# Altium PCB Telliskivi2014MainBoard.PcbDoc
Units mm, origin at the board's own origin, x right, y up, seen from the top; angles counter-clockwise.
Board outline 68 x 70 mm, 2 copper layers (Top Layer, Bottom Layer), stack 1.571 mm thick; 60 components, 72 nets, 319 pads, 235 vias.
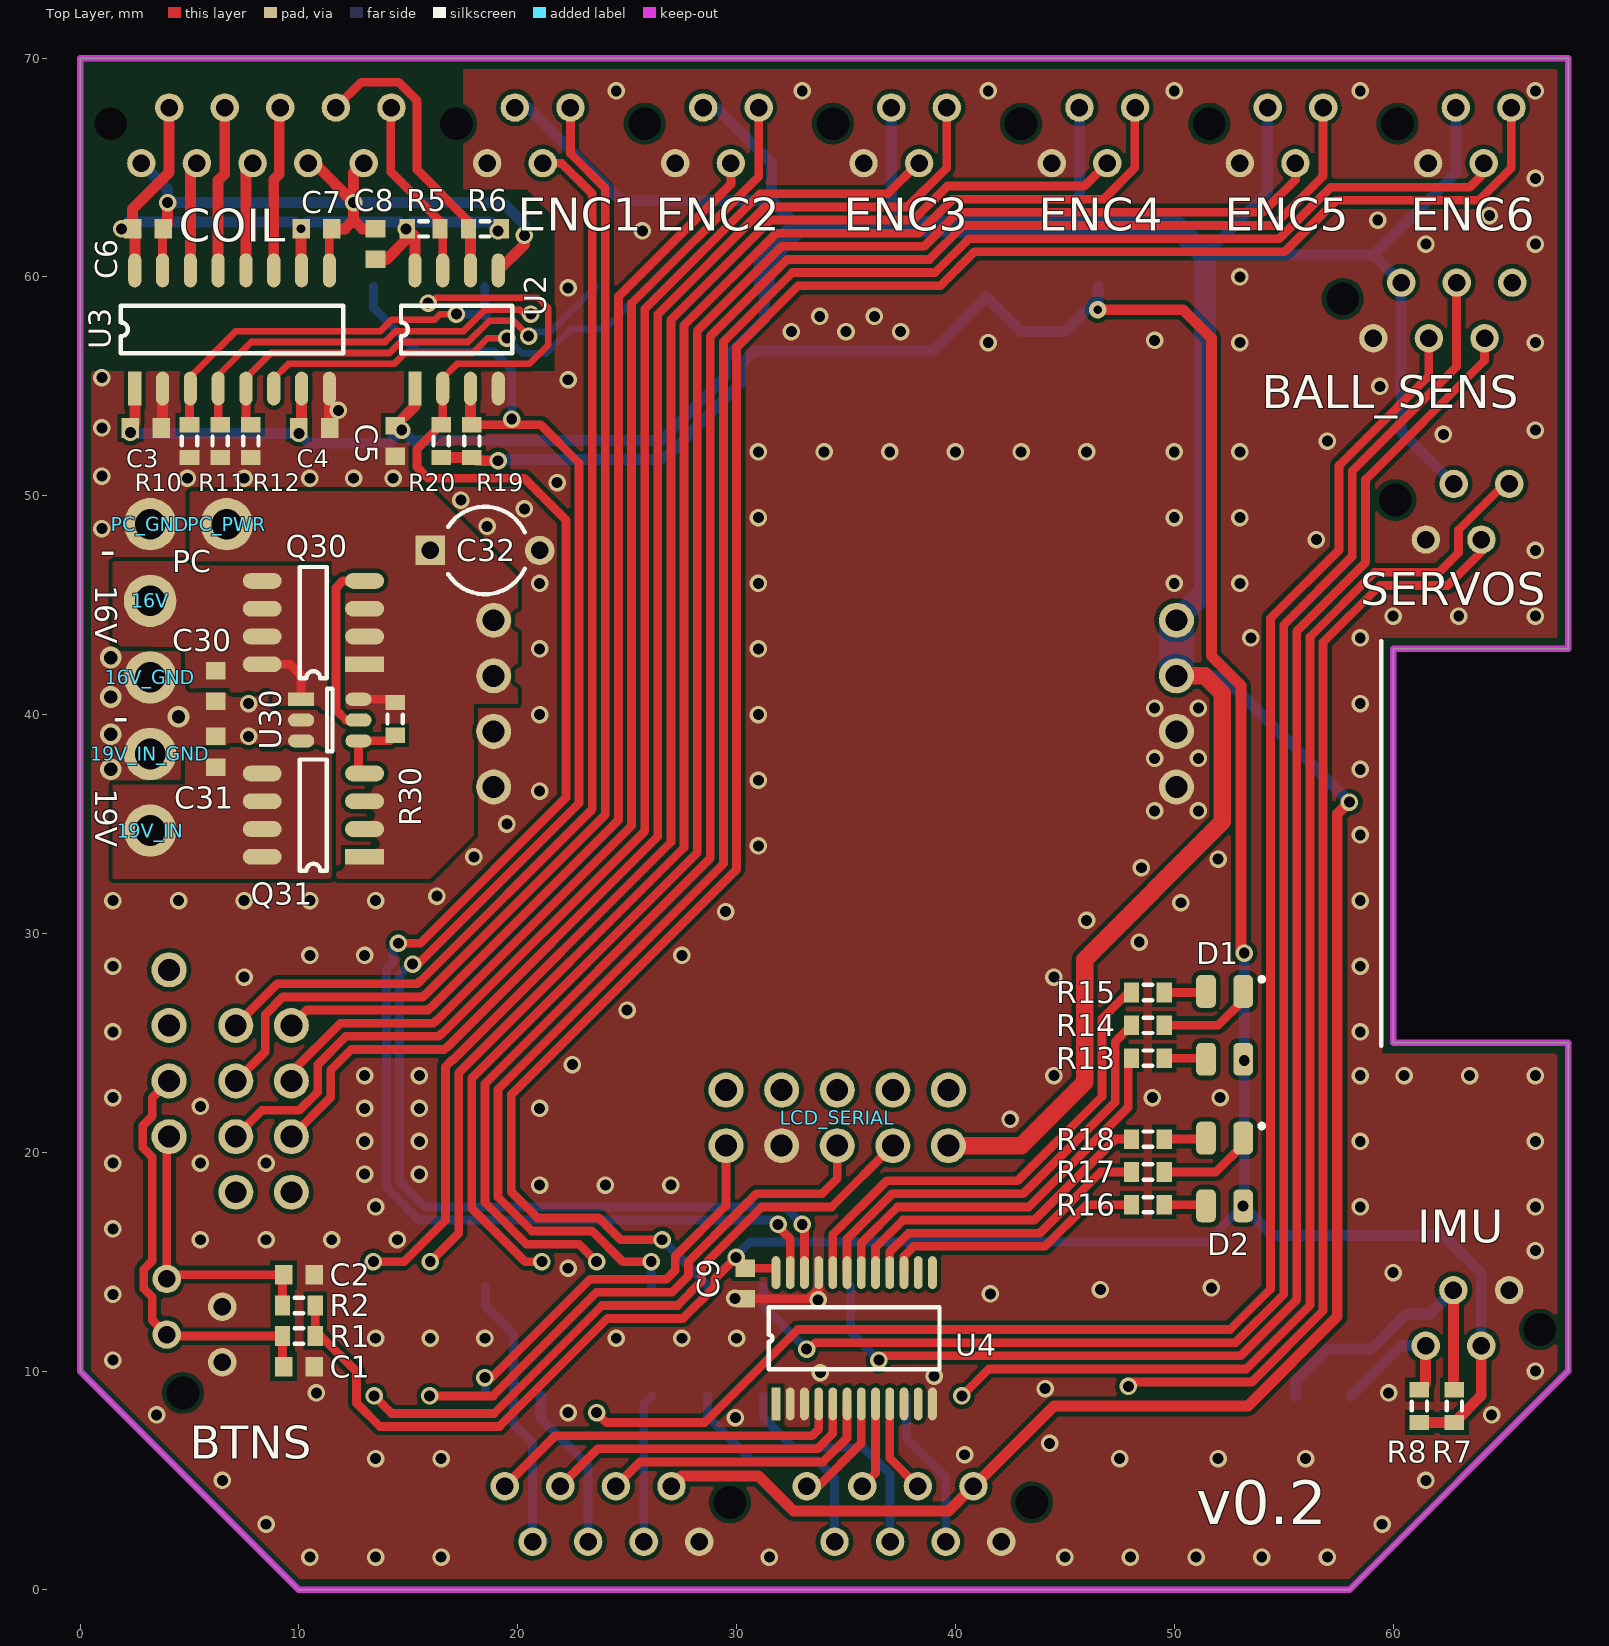
[diagram p0: Top Layer view]
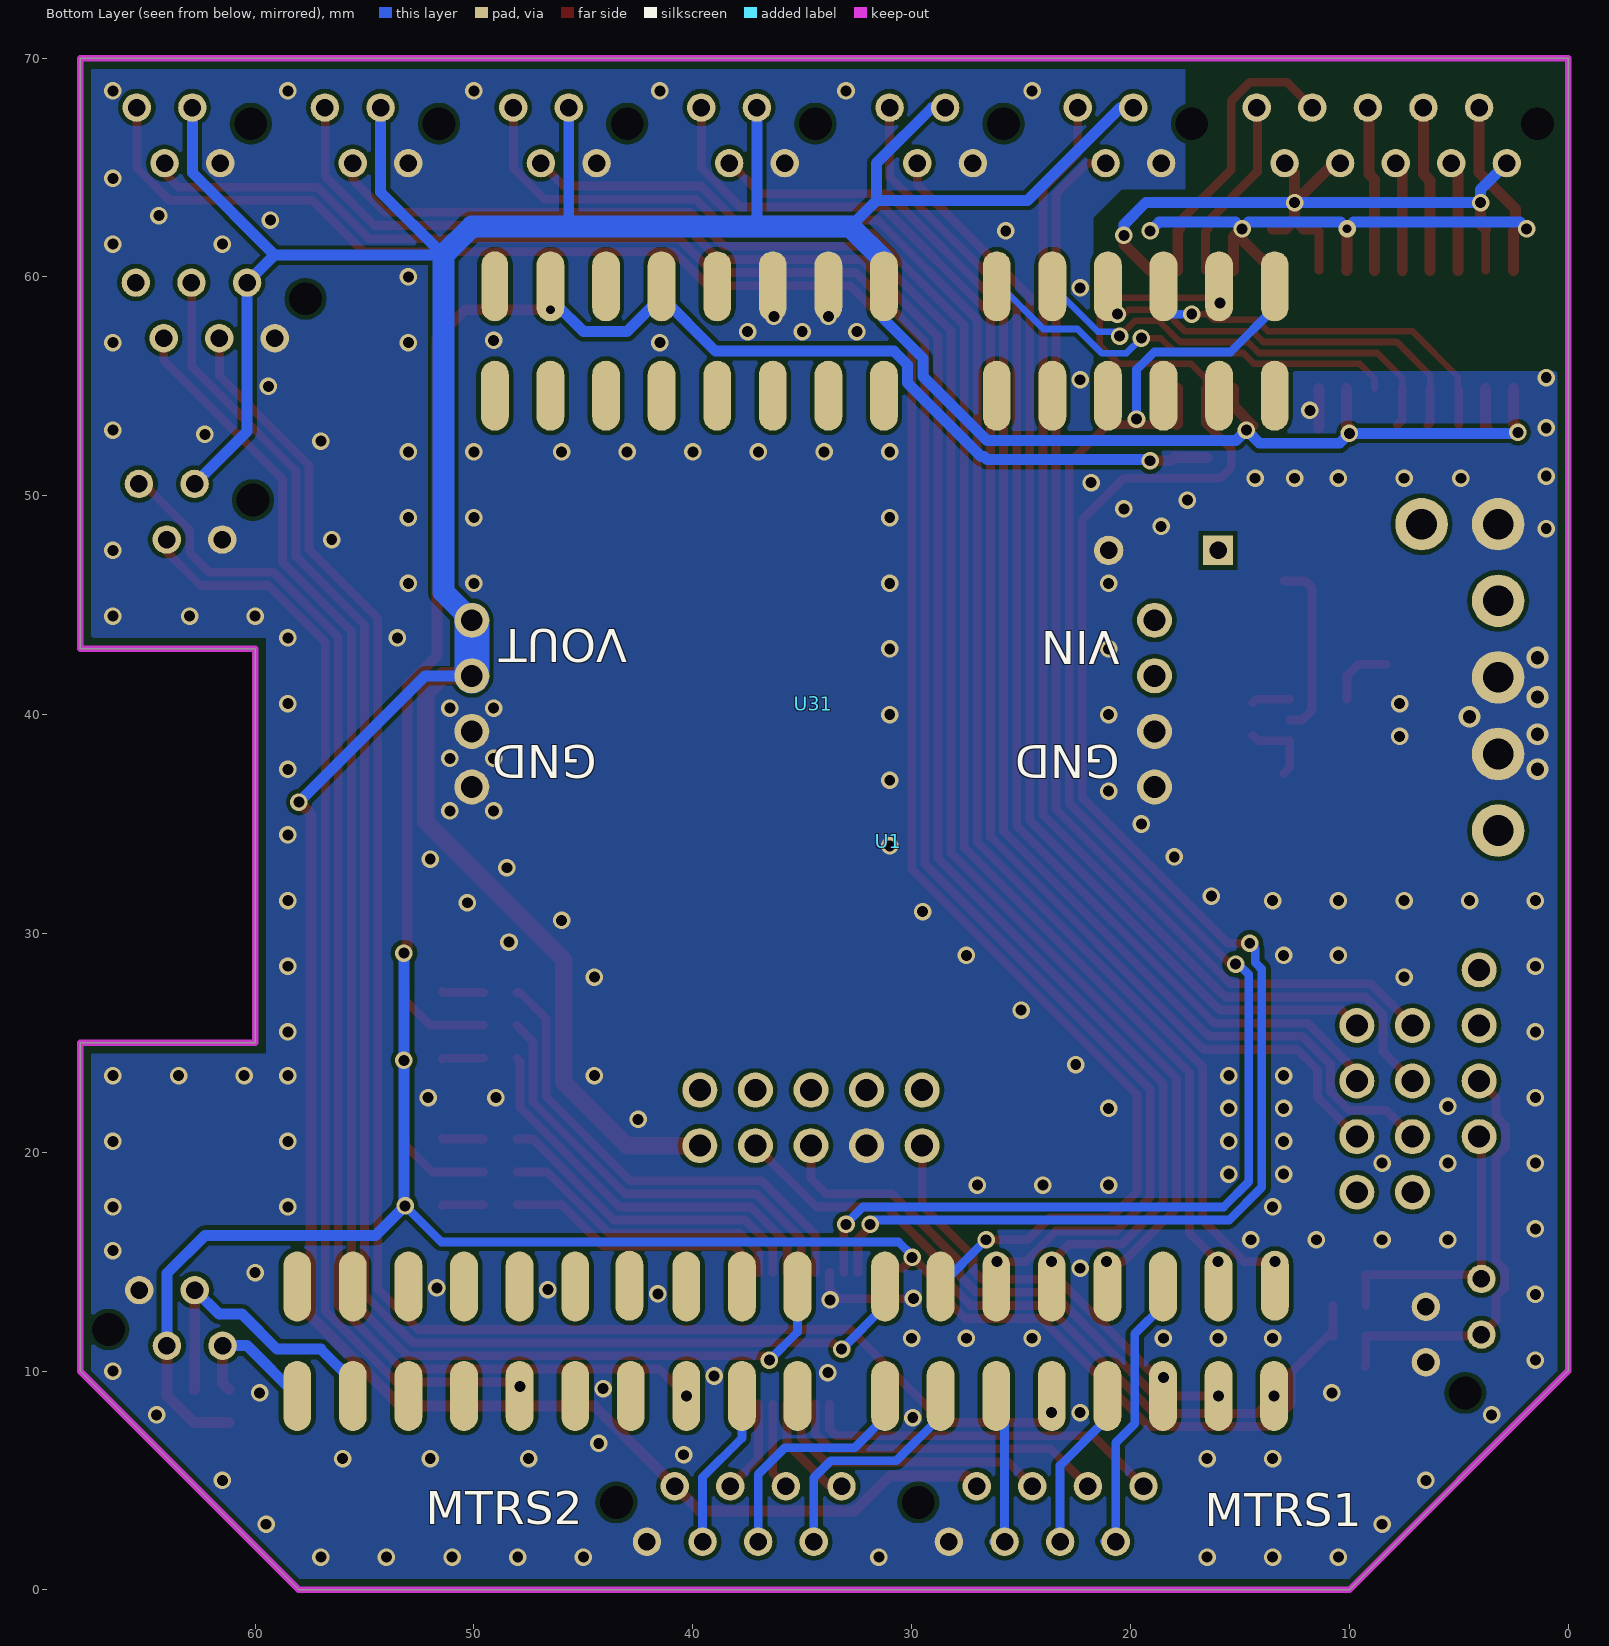
[diagram p1: Bottom Layer view, seen from below]

## Layer stack, top to bottom
Top Solder: solder mask 0.0102, Solder Resist, Dk 3.5
Top Layer: signal copper 0.0356
Dielectric 1: dielectric 1.5, FR-4, Dk 4.8
Bottom Layer: signal copper 0.0356
Bottom Solder: solder mask 0.0102, Solder Resist, Dk 3.5

## Board outline
10,0 58,0 68,10 68,25 60,25 60,43 68,43 68,70 0,70 0,10

## Design rules (kind name [scope] priority, off if disabled: settings)
Clearance [All] p1: gap=0.2
ComponentClearance [Not InComponent('U1') And InComponent('U31') vs Not InComponent('U1') And InComponent('U31')] p1: gap=0.254 collisioncheckmode=3 verticalgap=0.254 showdistances=TRUE
MinimumSolderMaskSliver [All] p1: minsoldermaskwidth=0.1
PlaneClearance [All] p1: clearance=0.5
PolygonConnect [All] p1: connectstyle=Direct reliefconductorwidth=0.3 reliefentries=4 polygonreliefangle="90 Angle" airgapwidth=0.3
RoomDefinition Telliskivi2014MainBoardPower [InComponentClass('Telliskivi2014MainBoardPower')] p1: confinementstyle=ConfineIn formatcopy=TRUE lockcomponents=FALSE outline -43.2,0 114.6,0 114.6,70 -43.2,70
RoomDefinition Telliskivi2014MainBoard [InComponentClass('Telliskivi2014MainBoard')] p2: confinementstyle=ConfineIn formatcopy=TRUE lockcomponents=FALSE outline -43.2,0 114.6,0 114.6,70 -43.2,70
RoutingVias [All] p1: holewidth=0.5 width=0.8 viastyle="Through Hole" minholewidth=0.4 minwidth=0.7 maxholewidth=0.7 maxwidth=1
SilkToSilkClearance [All] p1: silktosilkclearance=0.2
SilkToSolderMaskClearance [IsPad] p1: minsilkscreentomaskgap=0.2 clearancetoexposedcopper=TRUE
SolderMaskExpansion SolderMaskExpansion_Via [IsVia And (Not IsTestpoint)] p1: expansion=-5
SolderMaskExpansion [All] p2: expansion=0.1
UnpouredPolygon [All] p1: allowunpoured=FALSE
Width [All] p1: maxlimit=5 minlimit=0.3 preferedwidth=0.4 minimp=50.000000 maximp=50.000000 favimp=50.000000
24 further rules are at their usual default settings.

## Classes and differential pairs
component class Telliskivi2014MainBoard: BALL_SENS BTNS C1 C2 C3 C4 C5 C6 C7 C8 C9 COIL D1 D2 ENC1 ENC2 ENC3 ENC4 ENC5 ENC6 IMU LCD_SERIAL MTRS1 MTRS2 R1 R2 R5 R6 R7 R8 R10 R11 R12 R13 R14 R15 R16 R17 R18 R19 R20 SERVOS U1 U2 U3 U4
component class Telliskivi2014MainBoardPower: 16V 16V_GND 19V_IN 19V_IN_GND C30 C31 C32 PC_GND PC_PWR Q30 Q31 R30 U30 U31

## Components (designator, comment, footprint, x,y, rotation, side; value= is the part's Value field where it differs from the comment)
16V "HEADER-1" POWER-VIA 3.2,45.2 r0 top
16V_GND "HEADER-1" POWER-VIA 3.2,41.7 r90 top
19V_IN "HEADER-1" POWER-VIA 3.2,34.7 r0 top
19V_IN_GND "HEADER-1" POWER-VIA 3.2,38.2 r90 top
BALL_SENS "HEADER-6" MICRO-MATCH-6 59.1,57.2 r180 top
BTNS "HEADER-4" MICRO-MATCH-4 6.5,10.4 r270 top
C1 "100nF" 1608[0603] 10,10.2 r180 top
C2 "100nF" 1608[0603] 10,14.4 r180 top
C3 "100nF" 1608[0603] 3,53.1 r180 top
C4 "100nF" 1608[0603] 10.7,53.1 r0 top
C5 "100nF" 1608[0603] 14.4,52.5 r270 top
C6 "100nF" 1608[0603] 3.1,62.2 r0 top
C7 "100nF" 1608[0603] 10.8,62.2 r180 top
C8 "100nF" 1608[0603] 13.5,61.5 r270 top
C9 "100nF" 1608[0603] 30.4,14 r90 top
C30 "100nF" 1608[0603] 6.2,41.3 r270 top
C31 "100nF" 1608[0603] 6.2,38.3 r90 top
C32 "470uF" CAPR5-4X5 18.5,47.5 r0 top
COIL "HEADER-10" MICRO-MATCH-10 2.8,65.2 r180 top
D1 "RGB-LED" RGB-LED 52.3,25.8 r270 top
D2 "RGB-LED" RGB-LED 52.3,19.1 r270 top
ENC1 "HEADER-4" MICRO-MATCH-4 18.6,65.2 r180 top
ENC2 "HEADER-4" MICRO-MATCH-4 27.2,65.2 r180 top
ENC3 "HEADER-4" MICRO-MATCH-4 35.8,65.2 r180 top
ENC4 "HEADER-4" MICRO-MATCH-4 44.4,65.2 r180 top
ENC5 "HEADER-4" MICRO-MATCH-4 53,65.2 r180 top
ENC6 "HEADER-4" MICRO-MATCH-4 61.6,65.2 r180 top
IMU "HEADER-4" MICRO-MATCH-4 65.3,13.7 r0 top
LCD_SERIAL "uLCD-144-G2" uLCD-144-G2-NO-OVERLAY 19.1,17.7 r0 top
MTRS1 "HEADER-8" MICRO-MATCH-8 28.295,2.2 r0 bottom
MTRS2 "HEADER-8" MICRO-MATCH-8 42.095,2.2 r0 bottom
PC_GND "HEADER-1" POWER-VIA 3.2,48.7 r90 top
PC_PWR "HEADER-1" POWER-VIA 6.7,48.7 r90 top
Q30 "PMOS" SO8 13,42.3 r180 top
Q31 "PMOS" SO8 13,33.5 r180 top
R1 "10k" J1-0603 10,11.6 r180 top
R2 "10k" J1-0603 10,13 r180 top
R5 "2.2k" J1-0603 15.7,62.2 r180 top
R6 "2.2k" J1-0603 18.5,62.2 r0 top
R7 "2.2k" J1-0603 62.8,8.4 r90 top
R8 "2.2k" J1-0603 61.2,8.4 r90 top
R10 "10k" J1-0603 5,52.5 r90 top
R11 "10k" J1-0603 6.4,52.5 r90 top
R12 "10k" J1-0603 7.8,52.5 r90 top
R13 "1k" J1-0603 48.8,24.3 r180 top
R14 "1k" J1-0603 48.8,25.8 r180 top
R15 "1k" J1-0603 48.8,27.3 r180 top
R16 "1k" J1-0603 48.8,17.6 r180 top
R17 "1k" J1-0603 48.8,19.1 r180 top
R18 "1k" J1-0603 48.8,20.6 r180 top
R19 "2.2k" J1-0603 17.9,52.5 r90 top
R20 "2.2k" J1-0603 16.5,52.5 r90 top
R30 "470k" J1-0603 14.4,39.8 r90 top
SERVOS "HEADER-4" MICRO-MATCH-4 61.5,48 r180 top
U1 "FRDM-K64F" FRDM-K64F-SMT-NO-OVERLAY 62,58.1 r180 top locked
U2 "SI8602" SOIC8 15.3,54.9 r90 top
U3 "SI8641" SOIC16 2.5,54.9 r90 top
U4 "PCA9555" TSSOP24 31.8,8.5 r90 top
U30 "LTC4412" TSOT-23-6 10.1,40.7 r0 top
U31 "POLOLU-D24V90F5" POLOLU-D24V90F5-NO-OUTLINE 34.5,40.5 r0 bottom

## Footprints (in the part's own frame and the unit in brackets; to place one, negate y for a bottom-side part, rotate by r counter-clockwise, add the part's x,y. Pads: shape width x height; smd on the part's side, far side on the other; paste and mask are expansions set on the pad)
1608[0603] [mm] "Chip Capacitor, Body 1.6x0.8mm, IPC High Density"
  rect 0.8x0.9 smd: 1(-0.7,0) 2(0.7,0)
  body extent -0.87,-0.48 0.87,0.48, height 1.3
CAPR5-4X5 [mm] "Capacitor; 2 Leads"
  rect 1.35x1.35 hole 0.8: 1(-2.5,0)
  round 1.35 hole 0.8: 2(2.5,0)
  silkscreen extent -1.69,-2 1.82,2
FRDM-K64F-SMT-NO-OVERLAY [mm]
  oval 1.2x3.2 smd far side: 1(12.954,-1.471)
  oval 1.27x3.2 smd far side: 2(15.494,-1.471) 3(18.034,-1.471) 4(20.574,-1.471) 5(23.114,-1.471) 6(25.654,-1.471) 7(28.194,-1.471) 8(30.734,-1.471) 9(35.89,-1.471) 10(38.43,-1.471) 11(40.97,-1.471) 12(43.51,-1.471) 13(46.05,-1.471) 14(48.59,-1.471) 15(12.954,3.529) 16(15.494,3.529) 17(18.034,3.529) 18(20.574,3.529) 19(23.114,3.529) 20(25.654,3.529) 21(28.194,3.529) 22(30.734,3.529) 23(35.89,3.529) 24(38.43,3.529) 25(40.97,3.529) 26(43.51,3.529) 27(46.05,3.529) 28(48.59,3.529) 41(48.6,44.2) 42(46.025,44.236) 43(43.485,44.236) 44(40.945,44.236) 45(38.405,44.236) 46(35.865,44.236) 47(33.325,44.236) 48(30.785,44.236) 49(26.784,44.236) 50(24.244,44.236) 51(21.704,44.236) 52(19.1,44.2) 53(16.624,44.236) 54(14.084,44.236) 55(11.544,44.236) 56(9.004,44.236) 57(6.464,44.236) 58(3.924,44.236) 59(48.565,49.236) 60(46.025,49.236) 61(43.485,49.236) 62(40.945,49.236) 63(38.405,49.236) 64(35.865,49.236) 65(33.325,49.236) 66(30.785,49.236) 67(26.784,49.236) 68(24.244,49.236) 69(21.704,49.236) 70(19.164,49.236) 71(16.624,49.236) 72(14.084,49.236) 73(11.544,49.236) 74(9.004,49.236) 75(6.464,49.236) 76(3.924,49.236)
  round 1.6 hole 1: 29(52.344,39.926) 30(52.344,37.386) 31(52.344,34.846) 32(52.344,32.306) 33(54.884,32.306) 34(54.884,34.846) 35(54.884,37.386) 36(54.884,39.926) 37(57.932,37.386) 38(57.932,34.846) 39(57.932,32.306) 40(57.932,29.766)
  silkscreen extent 2.54,14.74 2.54,33.23
J1-0603 [mm] "Chip Resistor, Body 1.6x0.8mm, IPC High Density"
  rect 0.7x0.9 smd: 1(-0.75,0) 2(0.75,0)
  silkscreen extent -0.2,-0.35 0.2,0.35, body extent -0.85,-0.48 0.85,0.48, height 0.9
MICRO-MATCH-4 [mm]
  round 1.3 hole 0.8: 1(0,0) 2(-1.27,-2.54) 3(-2.54,0) 4(-3.81,-2.54)
  round 0 hole 1.5 unplated: drill(1.4,-1.8)
MICRO-MATCH-6 [mm]
  round 1.3 hole 0.8: 1(0,0) 2(-1.27,-2.54) 3(-2.54,0) 4(-3.81,-2.54) 5(-5.08,0) 6(-6.35,-2.54)
  round 0 hole 1.5 unplated: drill(1.4,-1.8)
MICRO-MATCH-8 [mm]
  round 1.3 hole 0.8: 1(0,0) 2(-1.27,-2.54) 3(-2.54,0) 4(-3.81,-2.54) 5(-5.08,0) 6(-6.35,-2.54) 7(-7.62,0) 8(-8.89,-2.54)
  round 0 hole 1.5 unplated: drill(1.4,-1.8)
MICRO-MATCH-10 [mm]
  round 1.3 hole 0.8: 1(0,0) 2(-1.27,-2.54) 3(-2.54,0) 4(-3.81,-2.54) 5(-5.08,0) 6(-6.35,-2.54) 7(-7.62,0) 8(-8.89,-2.54) 9(-10.16,0) 10(-11.43,-2.54)
  round 0 hole 1.5 unplated: drill(1.4,-1.8)
POLOLU-D24V90F5-NO-OUTLINE [mm]
  round 1.6 hole 1: 1(-15.6,3.81) 2(-15.6,1.27) 3(-15.6,-1.27) 4(-15.6,-3.81) 5(15.6,-3.81) 6(15.6,-1.27) 7(15.6,1.27) 8(15.6,3.81)
POWER-VIA [mm]
  round 2.4 hole 1.4: 1(0,0)
RGB-LED [mm] "WURTH ELEKTRONIK 150141M173100"
  rrect50% 1.5x0.9 smd: 1(1.55,0.85) 2(1.55,-0.85) 3(-1.55,0.85) 4(-1.55,-0.85)
  silkscreen extent -2.2,1.6 -2,1.8
SO8 [mm]
  rect 1.78x0.72 smd: 1(0,0)
  oval 1.78x0.72 smd: 2(0,-1.27) 3(0,-2.54) 4(0,-3.81) 5(4.68,-3.81) 6(4.68,-2.54) 7(4.68,-1.27) 8(4.68,0)
  silkscreen extent 1.72,-4.44 2.96,0.64
SOIC8 [mm]
  rect 1.55x0.6 smd: 1(0,0)
  oval 1.55x0.6 smd: 2(0,-1.27) 3(0,-2.54) 4(0,-3.81) 5(5.4,-3.81) 6(5.4,-2.54) 7(5.4,-1.27) 8(5.4,0)
  silkscreen extent 1.61,-4.44 3.79,0.64
SOIC16 [mm]
  rect 1.55x0.6 smd: 1(0,0)
  oval 1.55x0.6 smd: 2(0,-1.27) 3(0,-2.54) 4(0,-3.81) 5(0,-5.08) 6(0,-6.35) 7(0,-7.62) 8(0,-8.89) 9(5.4,-8.89) 10(5.4,-7.62) 11(5.4,-6.35) 12(5.4,-5.08) 13(5.4,-3.81) 14(5.4,-2.54) 15(5.4,-1.27) 16(5.4,0)
  silkscreen extent 1.61,-9.53 3.79,0.64
TSOT-23-6 [mm]
  rect 1.2x0.6 smd: 1(0,0)
  oval 1.2x0.6 smd: 2(0,-0.95) 3(0,-1.9) 4(2.62,-1.9) 5(2.62,-0.95) 6(2.62,0)
  silkscreen extent 1.19,-2.38 1.43,0.48
TSSOP24 [mm]
  rect 1.5x0.4 smd: 1(0,0)
  oval 1.5x0.4 smd: 2(0,-0.65) 3(0,-1.3) 4(0,-1.95) 5(0,-2.6) 6(0,-3.25) 7(0,-3.9) 8(0,-4.55) 9(0,-5.2) 10(0,-5.85) 11(0,-6.5) 12(0,-7.15) 13(6,-7.15) 14(6,-6.5) 15(6,-5.85) 16(6,-5.2) 17(6,-4.55) 18(6,-3.9) 19(6,-3.25) 20(6,-2.6) 21(6,-1.95) 22(6,-1.3) 23(6,-0.65) 24(6,0)
  silkscreen extent 1.58,-7.48 4.42,0.33
uLCD-144-G2-NO-OVERLAY [mm]
  round 1.6 hole 1: 1(20.58,2.6) 2(18.04,2.6) 3(15.5,2.6) 4(12.96,2.6) 5(10.42,2.6) 6(20.58,5.14) 7(18.04,5.14) 8(15.5,5.14) 9(12.96,5.14) 10(10.42,5.14)
  body extent 0,0 31,43, height 13.7

## Part data
C1 C2 C3 C4 C5 C6 C7 C8 C9 C30 C31: library part "Cap Semi", "Capacitor (Semiconductor SIM Model)"
C32: library part Cap2, "Capacitor"
R1 R2 R5 R6 R7 R8 R10 R11 R12 R13 R14 R15 R16 R17 R18 R19 R20 R30: library part Res3, "Resistor"

## Via types
v1: diameter 0.8, hole 0.5, Top Layer to Bottom Layer, 228 vias
v2: diameter 1, hole 0.6, Top Layer to Bottom Layer, 5 vias
v3: diameter 0.8, hole 0.4, Top Layer to Bottom Layer, 2 vias

## Nets (pads, with @x,y where several pads share a name; then routed paths per layer and width w, separated by ;. In a path a pad name is that pad's centre, name@x,y a point inside that pad or via, vN(x,y) a via of type N, cw(c..) or ccw(c..) an arc to the next point about the centre after c; other vN are vias at no path point)
3V3: C9.2 D1.1 D2.1 IMU.2 R1.1 R2.1 R7.1 R8.1 R19.1 R20.1 U1.2 U1.4 U4.24 | length 155.5
  Top Layer w0.4: R2.1 R1.1 11,11.6 12.635,9.965 12.635,8.533 13.704,7.464 19.161,7.464 24.097,12.4 27.546,12.4 29,13.854 29,14.22 v1(29.98,15.2) 29.98,15.12 C9.2 31.6,14.7 ; D1.1 v1(53.2,24.2)
  Top Layer w0.5: R20.1 R19.1 17.95,51.8 18.15,51.6 v1(19.1,51.6) ; v3(46.5,58.5) 50.4,58.5 51.7,57.2 51.7,42.672 53.05,41.322 53.05,29.25 v1(53.2,29.1) ; R8.1 R7.1 64.03,8.88 IMU.2
  Bottom Layer w0.4: v1(29.98,15.2) 29.98,15.28 30.6,15.9 51.5,15.9 v1(53.15,17.55)
  Bottom Layer w0.5: v1(19.1,51.6) 19.15,51.65 26.55,51.65 26.7,51.8 26.828,51.8 30.181,55.153 30.181,55.985 30.817,56.621 38.973,56.621 41.426,59.074 43,57.5 45,57.5 U1.2@46.25,58.75 ; v3(46.5,58.5) 46.506,58.506 U1.2 ; v1(53.2,29.1) v1(53.2,24.2) 53.2,17.6 v1(53.15,17.55) 54.5,16.2 62.3,16.2 64.03,14.47 IMU.2
5V: BALL_SENS.2 C3.2 C4.1 C5.1 ENC1.2 ENC2.2 ENC3.2 ENC4.2 ENC5.2 ENC6.2 LCD_SERIAL.1 MTRS1.2 MTRS2.2 SERVOS.2 U1.8 U2.1 U3.1 U3.7 U31.5 U31.6 | length 249.1
  Top Layer w0.5: C3.2 2.5,53.3 U3.1 ; C4.1 10.12,53.22 U3.7 ; C5.1 15.3,54.1 U2.1 ; MTRS1.2 27.485,5.2 31,5.2 32.6,3.6 39.685,3.6 MTRS2.2 40.842,4.74 44.502,8.4 53.362,8.4 57.45,12.488 57.45,35.45 v1(58,36)
  Top Layer w0.8: LCD_SERIAL.1 43,20.3 45.9,23.2 45.9,28.8 52.2,35.1 52.2,40.97 51.4,41.77 U31.6
  Bottom Layer w0.5: v1(2.3,52.9) 2.35,52.85 v1(10,52.85) 10.45,52.4 14.1,52.4 v1(14.7,53) 15.179,52.521 26.559,52.521 29.481,55.443 29.481,56.281 31.266,58.066 U1.8 ; ENC1.2 20.46,67.74 24.7,63.5 31.6,63.5 ; ENC2.2 29.06,67.74 31.6,65.2 31.6,63.5 ; 32.8,62.3 31.6,63.5 ; 37,62.3 37.07,62.37 ENC3.2 ; ENC4.2 45.67,62.33 45.7,62.3 ; U31.6 52.23,41.77 v1(58,36) ; ENC5.2 54.27,63.87 51.4,61 59.11,61 ; SERVOS.2 60.37,52.94 BALL_SENS.2 59.11,61 ; ENC6.2 62.87,64.76 59.11,61
  Bottom Layer w1: U1.8 31.266,60.766 32.8,62.3 37,62.3 45.7,62.3 50.1,62.3 51.4,61 51.4,45.61 U31.5
  Bottom Layer w1.6: U31.6 U31.5
5V_EXT: C6.1 C7.2 C8.2 COIL.2 R5.2 R6.2 U2.8 U3.10 U3.16 | length 32.4
  Top Layer w0.5: U3.16 2.5,62.1 C6.1 2.4,63.1 4.07,64.77 COIL.2 ; v3(10.1,62.2) 10.1,60.32 U3.10 ; C8.2 14,60.8 14.9,61.7 v1(14.9,62.2) ; R5.2 15.3,61.85 U2.8
  Bottom Layer w0.5: v1(1.9,62.2) 2.2,62.5 9.8,62.5 v3(10.1,62.2) 10.4,62.5 14.6,62.5 v1(14.9,62.2) 15.2,62.5 18.7,62.5 v1(19.1,62.1)
BALL1: BALL_SENS.3 U1.63 | length 80
  Top Layer w0.4: v1(23.6,8.1) 24.05,7.65 28.55,7.65 32.8,11.9 37.08,11.9 37.083,11.897 46.82,11.897 46.823,11.9 48.977,11.9 48.98,11.897 52.545,11.897 54.4,13.751 54.4,44.4 57.534,47.534 57.534,51.383 61.626,55.474 61.626,57.186 BALL_SENS.3
BALL2: BALL_SENS.4 U1.48 | length 76
  Top Layer w0.4: v1(33.2,11) 33.3,11 33.6,11.3 36.831,11.3 36.834,11.297 47.069,11.297 47.072,11.3 48.728,11.3 48.731,11.297 52.794,11.297 55,13.503 55,44.095 58.134,47.229 58.134,51.134 62.9,55.9 62.9,59.73 BALL_SENS.4
  Bottom Layer w0.4: U1.48 31.215,12.985 v1(33.2,11)
BALL3: BALL_SENS.5 U1.49 | length 71.6
  Top Layer w0.4: v1(36.5,10.5) 36.697,10.697 47.317,10.697 47.32,10.7 48.48,10.7 48.483,10.697 53.043,10.697 55.6,13.254 55.6,43.813 58.745,46.959 58.745,50.745 64.18,56.18 BALL_SENS.5
  Bottom Layer w0.4: U1.49 35.216,11.784 v1(36.5,10.5)
BALL4: BALL_SENS.6
BTN1: BTNS.2 C1.2 R1.2 U1.38 | length 19.6
  Top Layer w0.4: U1.38 3.3,22.486 3.3,21.643 2.868,21.211 2.868,20.217 3.3,19.784 3.3,15.035 2.91,14.645 2.91,13.775 3.3,13.385 3.3,12.33 BTNS.2 4.03,11.6 R1.2 9.25,10.25 C1.2
BTN2: BTNS.4 C2.2 R2.2 U1.37 | length 13.4
  Top Layer w0.4: U1.37 3.96,20.606 BTNS.4 4.15,14.4 C2.2 9.25,14.35 R2.2
CHARGE: R12.2 U1.10 U3.5 | length 20.7
  Top Layer w0.3: U3.5 7.58,55.38 8.725,56.525 14.139,56.525 14.639,57.025 17.732,57.025 18.707,58 19.8,58 v1(20.5,57.3) v1@20.6,57.2
  Top Layer w0.4: U3.5 7.58,53.47 R12.2
  Bottom Layer w0.3: v1(20.5,57.3) 20.7,57.5 21.499,57.5 U1.10
CHARGE_EXT: COIL.5 U3.12 | length 5
  Top Layer w0.5: U3.12 7.58,64.9 COIL.5
DIR1: MTRS1.4 U4.6 | length 13
  Top Layer w0.4: MTRS1.4 25.595,5.85 33.95,5.85 35.05,6.95 U4.6
DIR2: MTRS1.6 U4.5 | length 14.8
  Top Layer w0.4: MTRS1.6 23.655,6.45 33.701,6.45 34.4,7.149 U4.5
DIR3: MTRS1.8 U4.4 | length 16.6
  Top Layer w0.4: MTRS1.8 21.715,7.05 33.453,7.05 33.75,7.347 U4.4
DIR4: MTRS2.4 U4.9 | length 4.3
  Top Layer w0.4: U4.9 37,6.025 MTRS2.4
DIR5: MTRS2.6 U4.8 | length 4
  Top Layer w0.4: MTRS2.6 36.35,5.345 U4.8
DIR6: MTRS2.8 U4.7 | length 5.1
  Top Layer w0.4: MTRS2.8 33.74,4.74 35.7,6.7 U4.7
DONE: U1.9 U3.6 | length 20
  Top Layer w0.3: U3.6 8.85,55.35 9.525,56.025 14.346,56.025 14.846,56.525 17.939,56.525 18.614,57.2 v1(19.5,57.2)
  Bottom Layer w0.3: v1(19.5,57.2) 20.179,56.521 21.321,56.521 22.421,57.621 23.978,57.621 25.928,59.571 U1.9
DONE_EXT: COIL.6 U3.11 | length 7.6
  Top Layer w0.5: U3.11 8.85,64.45 9.1,64.7 9.1,67.69 COIL.6
ENC1A: ENC1.3 U1.33 | length 51.3
  Top Layer w0.4: U1.33 7.116,25.799 9.016,27.7 15.4,27.7 15.5,27.8 15.531,27.8 23.4,35.669 23.4,63.8 22,65.2 ENC1.3
ENC1B: ENC1.4 U1.34 | length 55.9
  Top Layer w0.4: U1.34 8.456,24.594 8.456,26.291 9.265,27.1 15.649,27.1 15.748,27.2 15.78,27.2 24,35.42 24,64.049 22.41,65.639 ENC1.4
ENC2A: ENC2.3 U1.32 | length 51
  Top Layer w0.4: U1.32 10.362,26.5 15.897,26.5 15.997,26.6 16.028,26.6 24.6,35.172 24.6,59.1 29.74,64.24 ENC2.3
ENC2B: ENC2.4 U1.31 | length 55.8
  Top Layer w0.4: U1.31 9.656,23.653 11.903,25.9 16.146,25.9 16.246,26 16.277,26 25.2,34.923 25.2,58.782 31.01,64.592 ENC2.4
ENC3A: ENC3.3 U1.35 | length 64.4
  Top Layer w0.4: U1.35 8.316,21.914 10.013,21.914 10.856,22.757 10.856,24.004 12.151,25.3 16.394,25.3 16.494,25.4 16.525,25.4 25.8,34.674 25.8,58.534 31.066,63.8 36.9,63.8 38.3,65.2 ENC3.3
ENC3B: ENC3.4 U1.30 | length 65.8
  Top Layer w0.4: U1.30 9.661,20.714 11.456,22.508 11.456,23.756 12.4,24.7 16.643,24.7 16.743,24.8 16.774,24.8 26.4,34.426 26.4,58.285 31.315,63.2 37.825,63.2 39.6,64.975 39.6,67.73 ENC3.4
ENC4A: ENC4.3 U1.41 | length 72.4
  Top Layer w0.4: v1(13.4,15) 14.8,15 16.7,16.9 16.7,23.909 16.991,24.2 17.022,24.2 27,34.177 27,58.037 31.563,62.6 38.073,62.6 39.623,64.15 45.89,64.15 ENC4.3
ENC4B: ENC4.4 U1.42 | length 73.9
  Top Layer w0.4: v1(16,15) 17.3,16.3 17.3,23.629 27.6,33.929 27.6,57.788 31.812,62 38.322,62 39.872,63.55 46.775,63.55 48.2,64.975 48.2,67.73 ENC4.4
ENC5A: ENC5.3 U1.44 | length 79.5
  Top Layer w0.4: v1(21.1,15) 20.338,15 17.9,17.437 17.9,23.38 28.2,33.68 28.2,57.539 32.06,61.4 38.571,61.4 40.121,62.95 54.05,62.95 55.54,64.44 ENC5.3
ENC5B: ENC5.4 U1.45 | length 84.2
  Top Layer w0.4: v1(23.6,15) 22.8,15.8 20.403,15.8 18.5,17.703 18.5,23.132 28.8,33.432 28.8,57.291 32.309,60.8 38.819,60.8 40.369,62.35 54.55,62.35 56.8,64.6 56.8,67.73 ENC5.4
ENC6A: ENC6.3 U1.46 | length 91.1
  Top Layer w0.4: v1(26.1,15) 24.8,15 23.4,16.4 20.651,16.4 19.1,17.951 19.1,22.883 29.4,33.183 29.4,57.042 32.558,60.2 39.068,60.2 40.618,61.75 54.799,61.75 57.149,64.1 63.5,64.1 64.14,64.74 ENC6.3
  Bottom Layer w0.4: v1(26.1,15) 26.1,13.899 U1.46
ENC6B: ENC6.4 U1.47 | length 95.2
  Top Layer w0.4: v1(26.6,16) 24.7,16 23.7,17 20.9,17 19.7,18.2 19.7,22.635 30,32.935 30,56.794 32.806,59.6 39.316,59.6 40.866,61.15 55.047,61.15 57.397,63.5 63.925,63.5 65.4,64.975 65.4,67.73 ENC6.4
  Bottom Layer w0.4: v1(26.6,16) 28.675,13.925 U1.47
GND: 16V_GND.1 19V_IN_GND.1 BALL_SENS.1 BTNS.1 BTNS.3 C1.1 C2.1 C3.1 C4.2 C5.2 C9.1 C30.2 C31.2 C32.2 ENC1.1 ENC2.1 ENC3.1 ENC4.1 ENC5.1 ENC6.1 IMU.1 LCD_SERIAL.4 MTRS1.1 MTRS2.1 PC_GND.1 R10.1 R11.1 R12.1 SERVOS.1 U1.6 U1.7 U2.4 U3.2 U3.8 U4.2 U4.3 U4.12 U4.21 U30.2 U30.3 U31.1 U31.2 U31.7 U31.8 | length 7.9
  Top Layer w0.4: C9.1 33.3,13.3 33.75,13.75 U4.21
  Top Layer w0.5: C3.1 3.77,53.17 U3.2 ; U3.8 11.39,53.11 C4.2
  other v1: 10.5,1.5 13.5,1.5 16.5,1.5 31.5,1.5 45,1.5 48,1.5 51,1.5 54,1.5 57,1.5 8.5,3 59.5,3 6.5,5 61.5,5 13.5,6 16.5,6 47.5,6 52,6 56,6 40.425,6.175 44.3,6.7 29.95,7.875 3.5,8 64.5,8 22.3,8.1 10.8,9 59.8,9 44.1,9.2 39.025,9.775 33.825,9.925 66.5,10 1.5,10.5 13.5,11.5 16,11.5 18.5,11.5 24.5,11.5 27.5,11.5 30,11.5 33.725,13.25 29.925,13.325 1.5,13.5 41.6,13.525 46.625,13.725 51.7,13.8 60,14.5 22.3,14.7 66.5,15.5 5.5,16 8.5,16 11.5,16 14.5,16 1.5,16.5 13.5,17.5 58.5,17.5 66.5,17.5 21,18.5 24,18.5 27,18.5 13,19 15.5,19 1.5,19.5 5.5,19.5 8.5,19.5 13,20.5 15.5,20.5 58.5,20.5 66.5,20.5 42.5,21.5 13,22 15.5,22 21,22 5.5,22.1 1.5,22.5 49,22.5 52.1,22.5 13,23.5 15.5,23.5 44.5,23.5 58.5,23.5 60.5,23.5 63.5,23.5 66.5,23.5 22.5,24 1.5,25.5 58.5,25.5 25,26.5 7.5,28 44.5,28 1.5,28.5 58.5,28.5 10.5,29 13,29 27.5,29 48.4,29.6 46,30.6 29.5,31 50.3,31.4 1.5,31.5 4.5,31.5 7.5,31.5 10.5,31.5 13.5,31.5 58.5,31.5 16.3,31.7 48.5,33 52,33.4 18,33.5 31,34 58.5,34.5 19.5,35 49.1,35.6 51.1,35.6 21,36.5 31,37 58.5,37.5 49.1,38 51.1,38 7.7,39 21,40 31,40 49.1,40.3 51.1,40.3 7.7,40.5 58.5,40.5 21,43 31,43 53.5,43.5 58.5,43.5 60,44.5 63,44.5 66.5,44.5 21,46 31,46 50,46 53,46 66.5,47.5 56.5,48 1,48.5 18.6,48.6 31,49 50,49 53,49 20.3,49.4 17.4,49.8 21.8,50.6 4.9,50.8 7.5,50.8 10.5,50.8 12.5,50.8 14.3,50.8 1,50.9 31,52 34,52 37,52 40,52 43,52 46,52 50,52 53,52 57,52.5 62.3,52.8 66.5,53 1,53.1 11.8,53.9 59.4,55 22.3,55.3 1,55.4 41.5,57 53,57 66.5,57 49.1,57.1 32.5,57.5 35,57.5 37.5,57.5 33.8,58.2 36.3,58.2 22.3,59.5 53,60 61.5,61.5 66.5,61.5 25.7,62.1 59.3,62.6 64.4,62.8 66.5,64.5 24.5,68.5 33,68.5 41.5,68.5 50,68.5 58.5,68.5 66.5,68.5
  other v2: 1.4,37.5 1.4,39.1 4.5,39.9 1.4,40.8 1.4,42.6
GND_EXT: C6.2 C7.1 C8.1 COIL.1 COIL.7 COIL.9 U2.5 U3.9 U3.15 | length 34.7
  Top Layer w0.4: U3.15 C6.2@3.77,62.17 ; U3.9 11.39,62.09 C7.1
  Top Layer w0.5: C6.2@3.77,62.17 C6.2 4,62.4 v1(4,63.4) ; COIL.7 10.7,65.2 v1(12.5,63.4) ; C7.1 12.1,62.2 12.5,62.6 ; COIL.9 12.5,64.74 v1(12.5,63.4) ; C8.1 12.9,62.2 12.5,62.6 ; U2.5 20.3,61.49 v1(20.3,61.9) ; 12.5,62.6 v1(12.5,63.4)
  Bottom Layer w0.5: COIL.1 4,64 v1(4,63.4) v1(12.5,63.4) 19.3,63.4 20.3,62.4 v1(20.3,61.9)
KICK1: R10.2 U1.12 U3.3 | length 18.6
  Top Layer w0.3: U3.3 5.04,55.44 7.125,57.525 13.725,57.525 14.25,58.05 16.211,58.05 16.461,58.3 ; 16.461,58.3 v1(17.2,58.3)
  Top Layer w0.4: R10.2 U3.3@5,54.86
  Bottom Layer w0.4: v1(17.2,58.3) U1.12@18.579,58.3 ; U1.12 18.49,58.21 18.5,58.22 18.4,58.32 18.479,58.4 U1.12@18.579,58.3
KICK1_EXT: COIL.3 U3.14 | length 5
  Top Layer w0.5: U3.14 5.04,64.9 COIL.3
KICK2: R11.2 U1.11 U3.4 | length 17.9
  Top Layer w0.3: U3.4 6.31,55.51 7.825,57.025 13.932,57.025 14.432,57.525 17.525,57.525 18.5,58.5 20.1,58.5 20.3,58.3 v1(20.6,58.3)
  Top Layer w0.4: U3.4 6.31,53.34 R11.2
KICK2_EXT: COIL.4 U3.13 | length 7.6
  Top Layer w0.5: U3.13 6.31,64.41 6.61,64.71 COIL.4
LCD_RST: LCD_SERIAL.5 U1.61 | length 18.5
  Top Layer w0.4: v1(18.5,9.7) 18.8,9.7 23.3,14.2 26.8,14.2 27.2,14.6 27.2,15.248 29.52,17.568 LCD_SERIAL.5
  Bottom Layer w0.4: v1(18.5,9.7) 18.5,9.851 18.515,9.836 U1.61
LED1B: R13.2 U4.18 | length 18.4
  Top Layer w0.4: U4.18 35.7,15.844 37.356,17.5 43.35,17.5 47.9,22.05 47.9,24.15 R13.2
LED1G: R15.2 U4.20 | length 22.1
  Top Layer w0.4: U4.20 34.4,16.241 36.859,18.7 42.853,18.7 46.7,22.547 46.7,26.1 47.9,27.3 R15.2
LED1R: R14.2 U4.19 | length 20.2
  Top Layer w0.4: U4.19 35.05,16.043 37.107,18.1 43.101,18.1 47.3,22.299 47.3,25.05 R14.2
LED2B: R16.2 U4.15 | length 12.1
  Top Layer w0.4: U4.15 37.65,15.249 38.101,15.7 44.096,15.7 45.996,17.6 R16.2
LED2G: R18.2 U4.17 | length 14.9
  Top Layer w0.4: U4.17 36.35,15.646 37.604,16.9 43.599,16.9 47.299,20.6 R18.2
LED2R: R17.2 U4.16 | length 13.5
  Top Layer w0.4: U4.16 37,15.447 37.853,16.3 43.847,16.3 46.647,19.1 R17.2
Net16V_1: 16V.1 C30.1 Q30.5 Q30.6 Q30.7 Q30.8 U30.1 | length 3.1
  Top Layer w0.4: Q30.8 9.59,42.3 10.1,41.79 U30.1
Net19V_IN_1: 19V_IN.1 C31.1 Q31.5 Q31.6 Q31.7 Q31.8
NetC32_1: C32.1 PC_PWR.1 Q30.1 Q30.2 Q30.3 Q31.1 Q31.2 Q31.3 R30.2 U30.6 U31.3 U31.4 | length 1.7
  Top Layer w0.4: U30.6 14.25,40.7 R30.2
NetD1_2: D1.2 R13.1 | length 1.9
  Top Layer w0.4: R13.1 51.4,24.3 D1.2
NetD1_3: D1.3 R14.1 | length 4.5
  Top Layer w0.4: R14.1 52,25.8 53.15,26.95 D1.3
NetD1_4: D1.4 R15.1 | length 1.9
  Top Layer w0.4: R15.1 51.4,27.3 D1.4
NetD2_2: D2.2 R16.1 | length 1.9
  Top Layer w0.4: R16.1 51.4,17.6 D2.2
NetD2_3: D2.3 R17.1 | length 4.4
  Top Layer w0.4: R17.1 51.9,19.1 53.15,20.35 D2.3
NetD2_4: D2.4 R18.1 | length 1.9
  Top Layer w0.4: R18.1 51.4,20.6 D2.4
NetQ30_4: Q30.4 U30.5 | length 8.2
  Top Layer w0.4: U30.5 12.15,39.75 11.7,40.2 11.7,45.8 12.01,46.11 Q30.4
NetQ31_4: Q31.4 R30.1 U30.4 | length 3.4
  Top Layer w0.4: Q31.4 12.72,37.59 U30.4 14.15,38.8 R30.1
PWM1: MTRS1.3 U1.64 | length 7
  Bottom Layer w0.4: MTRS1.3 25.755,8.484 U1.64 ; MTRS1.3@26.135,2.32 MTRS1.3@26.255,2.2
PWM2: MTRS1.5 U1.62 | length 7.6
  Bottom Layer w0.4: U1.62@21.055,7.845 23.215,5.685 MTRS1.5
  Bottom Layer w0.5: U1.62@21.055,7.845 U1.62
PWM3: MTRS1.7 U1.43 | length 12.6
  Bottom Layer w0.4: U1.43 18.515,12.985 19.8,11.7 19.8,7.6 20.675,6.725 MTRS1.7 ; MTRS1.7@21.175,2.2 MTRS1.7@21.2,2.225
PWM4: MTRS2.3 U1.68 | length 7.4
  Bottom Layer w0.4: U1.68 37.756,6.944 39.555,5.145 MTRS2.3
PWM5: MTRS2.5 U1.66 | length 10.9
  Bottom Layer w0.4: U1.66 31.215,7.885 32.6,6.5 35.8,6.5 37.015,5.285 MTRS2.5
PWM6: MTRS2.7 U1.65 | length 10.8
  Bottom Layer w0.4: U1.65 28.675,7.925 30.7,5.9 33.7,5.9 34.475,5.125 MTRS2.7
RESET: U1.3
RX: LCD_SERIAL.2 U1.59 | length 29.5
  Top Layer w0.4: v1(13.435,8.864) 14.235,8.064 18.913,8.064 23.849,13 27.297,13 28.4,14.103 28.4,14.751 31.149,17.5 34.34,17.5 LCD_SERIAL.2
SCL: IMU.4 R8.2 U1.76 | length 6.5
  Top Layer w0.5: R8.2 61.49,9.44 IMU.4
  Bottom Layer w0.5: U1.76 60.372,11.16 IMU.4
SCL2: R19.2 U1.14 U2.3 U4.22 | length 76.4
  Top Layer w0.4: v1(15.2,28.6) 15.451,28.6 22.8,35.949 22.8,51.5 21.05,53.25 v1@19.8,53.25 ; R19.2 v1@19.8,53.25 ; v1(19.725,53.5) 19.725,53.325 v1@19.8,53.25 ; v1(33,16.7) 33.1,16.6 U4.22
  Top Layer w0.5: U2.3 17.84,53.31 R19.2
  Bottom Layer w0.4: U1.14 13.41,58.59 15.429,56.571 18.919,56.571 19.59,55.9 19.6,55.9 19.725,55.775 v1(19.725,53.5) ; v1(15.2,28.6) 15.2,28.72 14.6,28.12 14.6,18.649 15.749,17.5 32.231,17.5 33,16.731 v1(33,16.7)
SCL2_EXT: COIL.8 R6.1 U2.6 | length 13.3
  Top Layer w0.4: COIL.8 12.85,68.9 14.555,68.9 15.4,68.055 15.4,64.9 17.75,62.55 R6.1
  Top Layer w0.5: R6.1 17.84,62.11 U2.6
SDA: IMU.3 R7.2 U1.75 | length 14.2
  Top Layer w0.5: IMU.3 62.76,9.19 R7.2
  Bottom Layer w0.5: U1.75 55.536,9.536 57,11 59,11 60.6,12.6 61.66,12.6 IMU.3
SDA2: R20.2 U1.13 U2.2 U4.23 | length 80.8
  Top Layer w0.3: v1(15.9,58.8) 16,58.8 16.25,59.05 20.911,59.05 21.4,58.561 21.4,56.9 20.525,56.025 17.225,56.025 16.57,55.37 U2.2
  Top Layer w0.4: v1(14.55,29.55) 15.553,29.55 22.2,36.197 22.2,48.9 20.3,50.8 15.9,50.8 15.4,51.3 15.4,52.15 R20.2 16.57,53.32 U2.2 ; v1(31.9,16.7) 31.9,16.6 32.45,16.05 U4.23
  Bottom Layer w0.4: v1(14.55,29.55) 14.3,29.3 14.3,28.669 14,28.369 14,18.4 15.5,16.9 31.7,16.9 v1(31.9,16.7)
SDA2_EXT: COIL.10 R5.1 U2.7 | length 8.4
  Top Layer w0.4: COIL.10 14.2,67.71 14.2,64.8 16.45,62.55 R5.1 16.57,62.08 U2.7
SERVO1: SERVOS.3 U1.72 | length 50.4
  Top Layer w0.4: v1(47.9,9.3) 48.097,9.497 53.54,9.497 56.8,12.757 56.8,43.3 59.4,45.9 62.5,45.9 64.04,47.44 SERVOS.3
SERVO2: SERVOS.4 U1.69 | length 60.8
  Top Layer w0.4: v1(40.296,8.864) 41.529,10.097 47.566,10.097 47.569,10.1 48.231,10.1 48.234,10.097 53.291,10.097 56.2,13.006 56.2,43.549 59.151,46.5 62.1,46.5 62.99,47.39 62.99,48.435 65.095,50.54 SERVOS.4
TX: LCD_SERIAL.3 U1.60 | length 24.6
  Top Layer w0.4: v1(15.975,8.864) 18.864,8.864 23.6,13.6 27.049,13.6 27.8,14.351 27.8,15 30.12,17.32 30.9,18.1 33.9,18.1 34.6,18.8 LCD_SERIAL.3
pads on no net: BALL_SENS.drill BTNS.drill COIL.drill ENC1.drill ENC2.drill ENC3.drill ENC4.drill ENC5.drill ENC6.drill IMU.drill LCD_SERIAL.6 LCD_SERIAL.7 LCD_SERIAL.8 LCD_SERIAL.9 LCD_SERIAL.10 MTRS1.drill MTRS2.drill SERVOS.drill U1.1 U1.5 U1.15 U1.16 U1.17 U1.18 U1.19 U1.20 U1.21 U1.22 U1.23 U1.24 U1.25 U1.26 U1.27 U1.28 U1.29 U1.36 U1.39 U1.40 U1.50 U1.51 U1.52 U1.53 U1.54 U1.55 U1.56 U1.57 U1.58 U1.67 U1.70 U1.71 U1.73 U1.74 U4.1 U4.10 U4.11 U4.13 U4.14

## Polygon pours and split planes (outlines as drawn)
GND on Top Layer "Top Layer-No Net" (solid, remove dead copper, pour order 12): 0.5,55.7 21.7,55.7 21.7,62.7 20.4,64 17.5,64 17.5,69.5 67.5,69.5 67.5,43.5 59.5,43.5 59.5,24.5 67.5,24.5 67.5,10 58,0.5 10,0.5 0.5,10
NetC32_1 on Top Layer "Top Layer-No Net" (solid, remove dead copper, pour order 10): 11.5,32.5 16,32.5 18,34.5 18,40.5 20,40.5 20,46.3 16.1,50.2 5,50.2 5,47 11.5,47
Net16V_1 on Top Layer "Top Layer-No Net" (solid, remove dead copper, pour order 4): 1.5,43.1 1.5,47 11.5,47 11.5,40.196 8.6,40.196 8.6,41 4.8,41 4.8,43.1
GND on Top Layer "Top Layer-No Net" (solid, remove dead copper, pour order 5): 0.5,36.8 4.8,36.8 4.8,38.5 11.5,38.5 11.5,40.2 8.6,40.2 8.6,41 4.8,41 4.8,43.1 0.5,43.1
Net19V_IN_1 on Top Layer "Top Layer-No Net" (solid, remove dead copper, pour order 2): 1.5,32.5 11.5,32.5 11.5,38.5 4.8,38.5 4.8,36.8 1.5,36.8
GND on Bottom Layer "Top Layer-No Net" (solid, remove dead copper, pour order 14): 0.5,55.7 0.5,10 10,0.5 58,0.5 67.5,10 67.5,24.5 59.5,24.5 59.5,43.5 67.5,43.5 67.5,69.5 17.5,69.5 17.5,64 20.4,64 21.7,62.7 21.7,55.7

## Keep-outs
Keep-Out Layer:
  lines w0.3: 62.1,43 60,43 60,25 68,25 68,10 58,0 10,0 0,10 0,70 68,70 68,43 62.1,43 ; 62.1,43 62.1,43

## Silkscreen, mask and mechanical layers (free items; w line width, h text height)
Top Overlay:
  text "-" at 0.9,46.8 h1.52
  text "PC" at 4.2,46.5 h1
  text "16V" at 0.7,45.9 h1 r270
  text "-" at 1.5,39.2 h1.52
  text "19V" at 0.7,36.6 h1 r270
  text "v0.2" at 51,3 h2

## Text inside footprints (layer, text, board x,y; h text height)
U31: Bottom Overlay "GND" at 20.5,38.6 h1.52 r180; Bottom Overlay "GND" at 44.4,38.6 h1.52 r180; Bottom Overlay "VIN" at 20.5,43.8 h1.52 r180; Bottom Overlay "VOUT" at 43,43.9 h1.52 r180